# EAGLE board Motor_Driver_v2 (EAGLE 7.4.0)
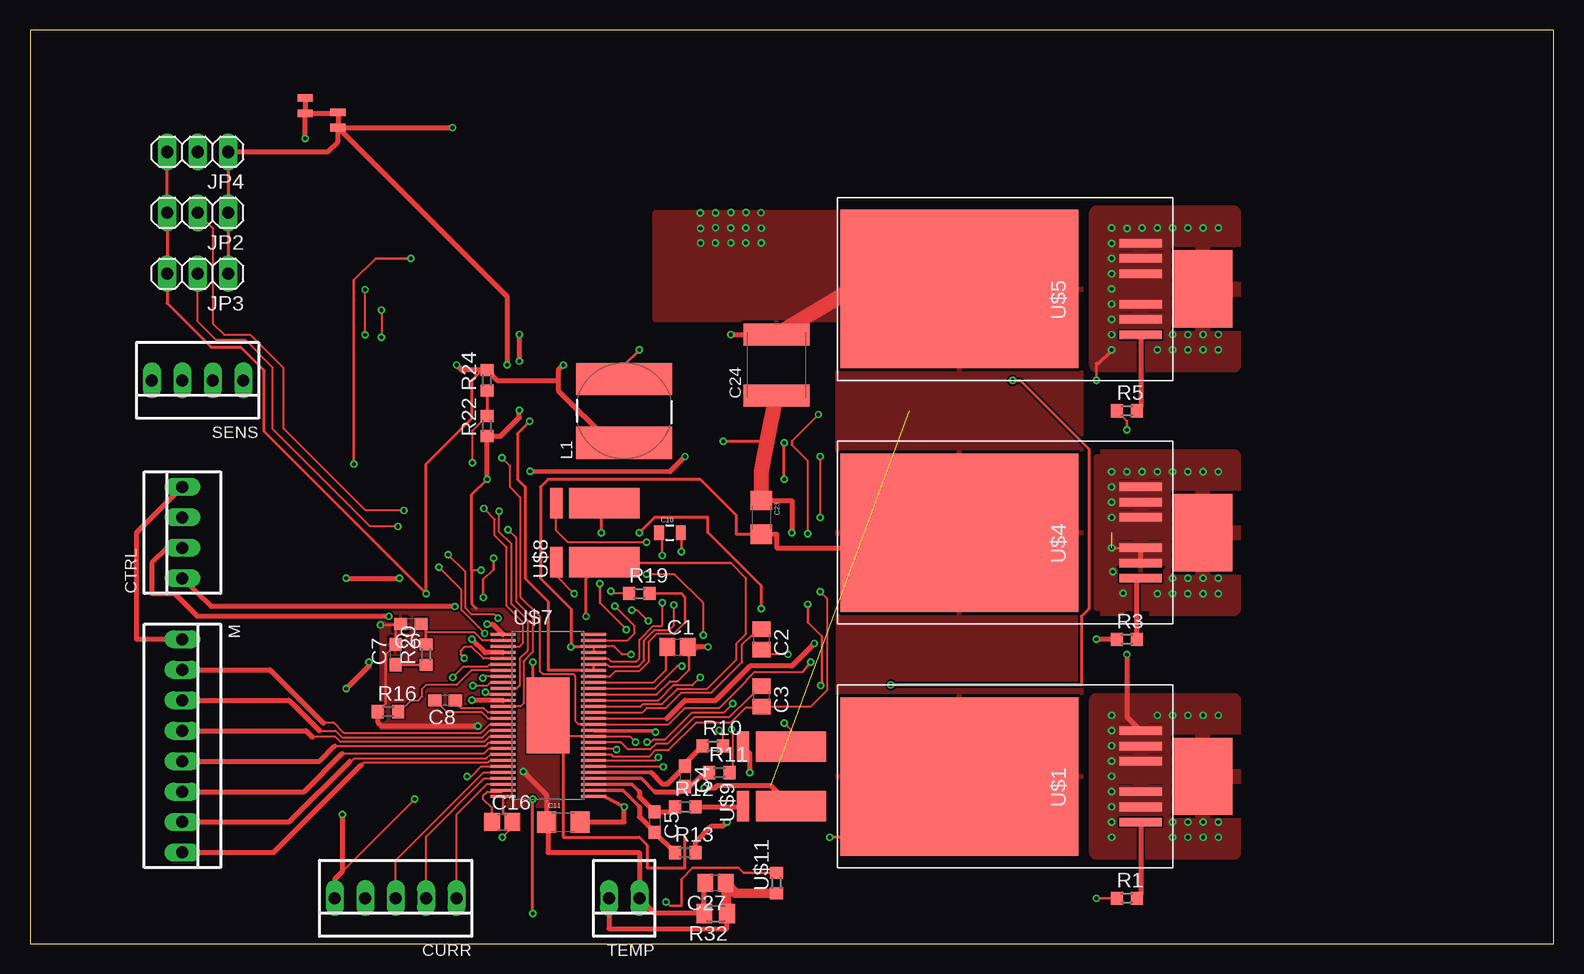
[diagram p0: board, top side]
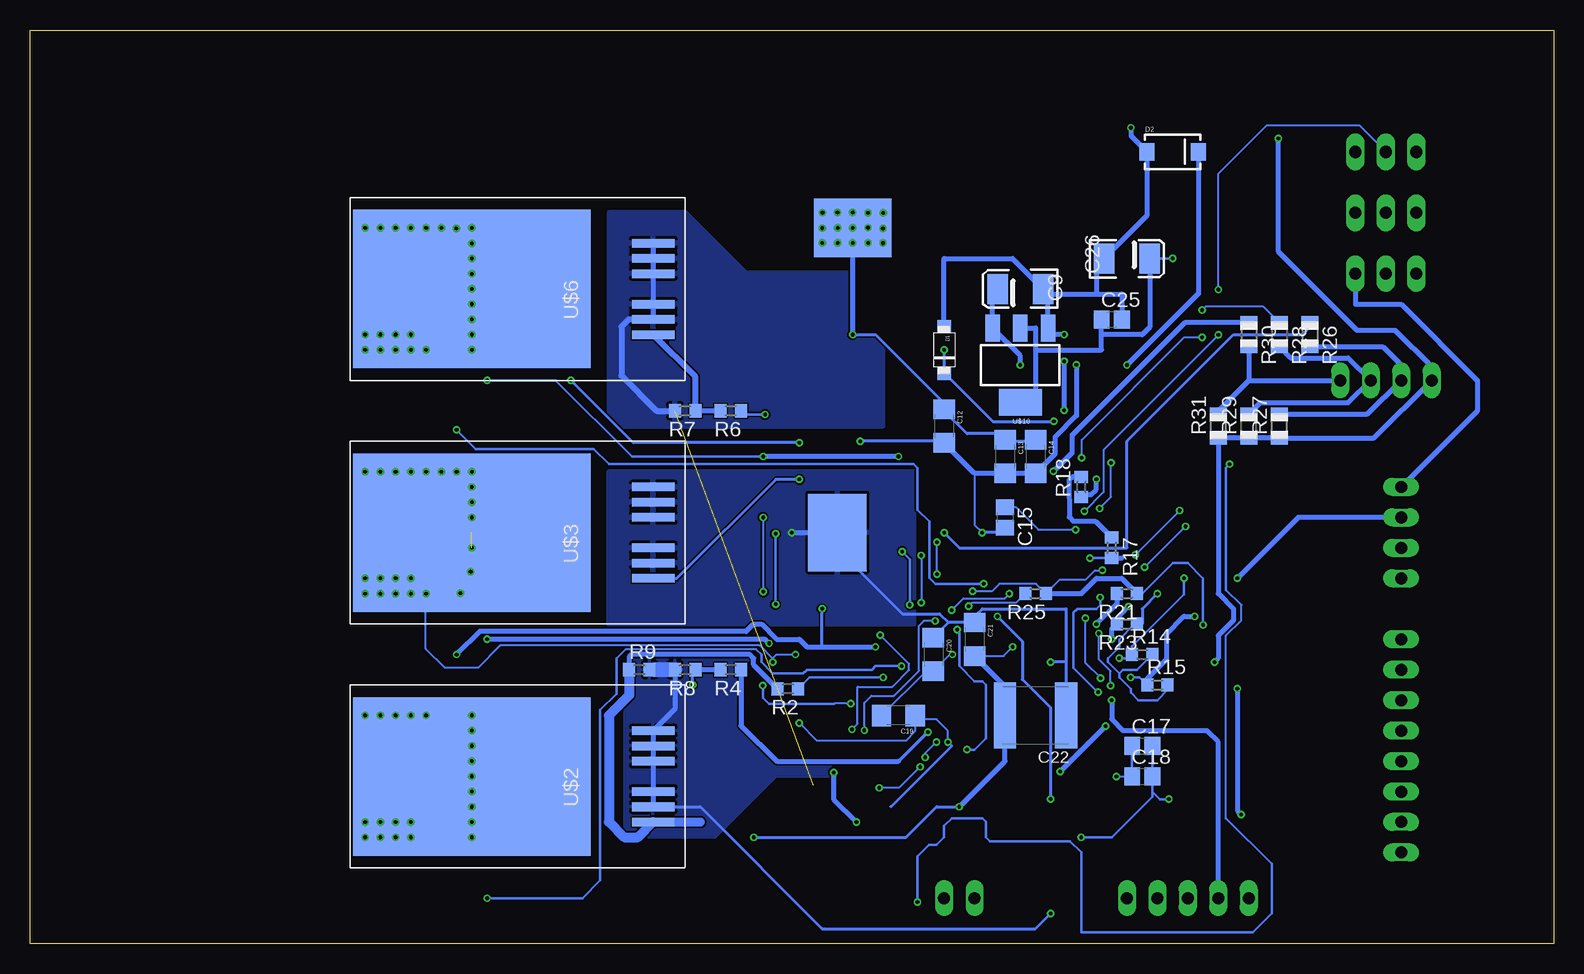
[diagram p1: board, bottom side, seen from below]

Size 127 x 76.2 mm. Coordinates in mm from the lower left corner, seen from the top.
Outline: 0,0 127,0 127,76.2 0,76.2 0,0
Copper layers (1*16): Top 0.035mm / dielectric 1.5mm / Bottom 0.035mm
Design rules "ITEADstudio_DRC": minimum track width 6mil, minimum drill 12mil, track to track 6mil, track to pad 6mil, pad to pad 6mil, via to via 6mil, smd to smd 0mil, copper to edge 10mil, drill to drill 10mil, minimum pad ring 10mil, minimum via ring 6mil, stop-mask expansion 2mil, vias tented up to drill 100mil, thermal gap 10mil

## Footprints (pad centres in the part's own frame; a part is rotated, then mirrored left to right if it is on the bottom)
C0805 = smd 1.3 x 1.5: 1 -0.85,0; 2 0.85,0
C0603 = smd 1.1 x 1: 1 -0.85,0; 2 0.85,0
EIA3528-KIT = smd 1.7 x 2.5: A 1.9,0; C -1.9,0
0805 = smd 0.8 x 1.2: 1 -0.9,0; 2 0.9,0
1206 = smd 1.6 x 1.8: 1 -1.4,0; 2 1.4,0
C2220K = smd 1.85 x 5.5: 1 -2.55,0; 2 2.55,0
22-23-2041 = drill 1 long: 1 -3.81,0; 2 -1.27,0; 3 1.27,0; 4 3.81,0
22-23-2051 = drill 1 long: 1 -5.08,0; 2 -2.54,0; 3 0,0; 4 2.54,0; 5 5.08,0
SOD123W = smd 1.1 x 1.1: P$1 -1.95,0; P$2 1.95,0
SMA-DIODE = smd 1.27 x 1.47: A -2.15,0; C 2.15,0
1X03 = drill 1.016 long: 1 -2.54,0; 2 0,0; 3 2.54,0
SDR0805 = smd 2.7 x 8: 1 -2.65,0; 2 2.65,0
22-23-2081 = drill 1 long: 1 -8.89,0; 2 -6.35,0; 3 -3.81,0; 4 -1.27,0; 5 1.27,0; 6 3.81,0; 7 6.35,0; 8 8.89,0
2PT_GND_TIE = smd 1.27 x 0.635: P$1 0,0.635; P$2 0,-0.635
R0603 = smd 1 x 1.1: 1 -0.85,0; 2 0.85,0
R0805 = smd 1.1 x 1.4: 1 -1,0; 2 1,0
M0805 = smd 1.3 x 1.6: 1 -0.95,0; 2 0.95,0
22-23-2021 = drill 1 long: 1 -1.27,0; 2 1.27,0
IRF7530_HEATSINK = smd 13.208 x 19.812: D1 0,1.27 | smd 0.711 x 3.556: G1 -3.81,-13.856; S1 -2.54,-13.856; S2 -1.27,-13.856; S3 1.27,-13.856; S4 2.54,-13.856; S5 3.81,-13.856
DRV8302 = smd 3.61 x 6.35: GND 0,0 | smd 2.1 x 0.27: P$1 -3.75,6.75; P$2 -3.75,6.25; P$3 -3.75,5.75; P$4 -3.75,5.25; P$5 -3.75,4.75; P$6 -3.75,4.25; P$7 -3.75,3.75; P$8 -3.75,3.25; P$9 -3.75,2.75; P$10 -3.75,2.25; P$11 -3.75,1.75; P$12 -3.75,1.25; P$13 -3.75,0.75; P$14 -3.75,0.25; P$15 -3.75,-0.25; P$16 -3.75,-0.75; P$17 -3.75,-1.25; P$18 -3.75,-1.75; P$19 -3.75,-2.25; P$20 -3.75,-2.75; P$21 -3.75,-3.25; P$22 -3.75,-3.75; P$23 -3.75,-4.25; P$24 -3.75,-4.75; P$25 -3.75,-5.25; P$26 -3.75,-5.75; P$27 -3.75,-6.25; P$28 -3.75,-6.75; P$29 3.8,-6.75; P$30 3.8,-6.25; P$31 3.8,-5.75; P$32 3.8,-5.25; P$33 3.8,-4.75; P$34 3.8,-4.25; P$35 3.8,-3.75; P$36 3.8,-3.25; P$37 3.8,-2.75; P$38 3.8,-2.25; P$39 3.8,-1.75; P$40 3.8,-1.25; P$41 3.8,-0.75; P$42 3.8,-0.25; P$43 3.8,0.25; P$44 3.8,0.75; P$45 3.8,1.25; P$46 3.8,1.75; P$47 3.8,2.25; P$48 3.8,2.75; P$49 3.8,3.25; P$50 3.8,3.75; P$51 3.8,4.25; P$52 3.8,4.75; P$53 3.8,5.25; P$54 3.8,5.75; P$55 3.8,6.25; P$56 3.8,6.75
WSLP2726 = smd 2.54 x 5.842: P$1 -2.464,-0.889; P$2 2.464,-0.889 | smd 2.54 x 1.016: P$3 -2.464,3.111; P$4 2.464,3.111
SOT223 = smd 1.219 x 2.235: 1 -2.311,-3.099; 2 0,-3.099; 3 2.311,-3.099 | smd 3.6 x 2.2: 4 0,3.099
1CONN_PAD = smd 6.452 x 4.877: P$1 0,0

## Placement (x,y rotation side)
C1  220n  [C0805]  53.98,24.77 0 top
C2  220n  [C0805]  60.96,25.4 270 top
C3  220n  [C0805]  60.96,20.64 270 top
C4  2.2n  [C0603]  54.61,13.97 270 top
C5  2.2n  [C0603]  52.07,10.16 270 top
C6  6.8nF  [C0603]  31.75,26.67 180 top
C7  120pF  [C0603]  30.48,24.13 90 top
C8  22nF  [C0603]  34.61,20.32 180 top
C9  100uF  [EIA3528-KIT]  44.45,54.61 180 bottom
C10  100nF  [0805]  53.34,34.29 0 top
C11  10u,50V  [1206]  44.45,10.16 0 top
C12  10u,50V  [1206]  50.8,43.18 270 bottom
C13  10u,50V  [1206]  45.72,40.64 270 bottom
C14  10u,50V  [1206]  43.18,40.64 270 bottom
C15  2.2u  [C0805]  45.72,35.56 270 bottom
C16  2.2u  [C0805]  39.37,10.16 0 top
C17  2.2u  [C0805]  34.29,16.51 0 bottom
C18  2.2u  [C0805]  34.29,13.97 0 bottom
C19  10u,50V  [1206]  54.61,19.05 180 bottom
C20  10u,50V  [1206]  51.7,24.14 270 bottom
C21  10u,50V  [1206]  48.26,25.4 270 bottom
C22  15u,100V  [C2220K]  43.18,19.05 180 bottom
C23  10u,50V  [1206]  60.96,35.56 270 top
C24  15u,100V  [C2220K]  62.23,48.26 90 top
C25  2.2u  [C0805]  36.83,52.07 0 bottom
C26  100uF  [EIA3528-KIT]  35.56,57.15 0 bottom
C27  2.2u  [C0805]  57.15,5.08 180 top
CTRL  22-23-2041  [22-23-2041]  12.7,34.29 90 top
CURR  22-23-2051  [22-23-2051]  30.48,3.81 180 top
D1  PMEG6020ER,115  [SOD123W]  50.8,49.53 270 bottom
D2  SMAJ5.0A  [SMA-DIODE]  31.75,66.04 0 bottom
JP2  M_PWM  [1X03]  13.97,60.96 180 top
JP3  M_OC  [1X03]  13.97,55.88 180 top
JP4  GAIN  [1X03]  13.97,66.04 180 top
L1  22uH  [SDR0805]  49.53,44.45 90 top
M  22-23-2081  [22-23-2081]  12.7,16.51 270 top
PT1  2PT_GND_TIE  [2PT_GND_TIE]  25.67,68.69 0 top
PT2  2PT_GND_TIE  [2PT_GND_TIE]  22.94,69.89 0 top
R1  4.7K  [R0603]  91.44,3.81 0 top
R2  4.7K  [R0603]  63.82,21.27 180 bottom
R3  4.7K  [R0603]  91.44,25.4 0 top
R4  4.7K  [R0603]  68.58,22.86 180 bottom
R5  4.7K  [R0603]  91.44,44.45 0 top
R6  4.7K  [R0603]  68.58,44.45 180 bottom
R7  39K  [R0603]  72.39,44.45 180 bottom
R8  39K  [R0603]  72.39,22.86 180 bottom
R9  39K  [R0603]  76.2,22.86 0 bottom
R10  100R  [R0603]  56.92,16.51 0 top
R11  100R  [R0603]  57.47,14.29 0 top
R12  100R  [R0603]  54.61,11.43 0 top
R13  100R  [R0603]  54.61,7.62 0 top
R14  10K  [R0603]  34.29,24.13 0 bottom
R15  10K  [R0603]  33.02,21.59 0 bottom
R16  10K  [R0603]  29.84,19.37 0 top
R17  270K  [R0603]  36.83,33.02 270 bottom
R18  10K  [R0603]  39.37,38.1 90 bottom
R19  1M  [R0603]  50.8,29.21 0 top
R20  15K  [R0603]  33.02,24.13 90 top
R21  220K  [R0603]  35.56,29.21 180 bottom
R22  3.3K  [R0603]  38.1,43.18 90 top
R23  10K  [R0603]  35.56,26.67 180 bottom
R24  18K  [R0603]  38.1,46.99 90 top
R25  0R  [R0603]  43.18,29.21 180 bottom
R26  39K  [R0805]  20.32,50.8 270 bottom
R27  2.2K  [R0805]  22.86,43.18 90 bottom
R28  39K  [R0805]  22.86,50.8 270 bottom
R29  2.2K  [R0805]  25.4,43.18 90 bottom
R30  39K  [R0805]  25.4,50.8 270 bottom
R31  2.2K  [R0805]  27.94,43.18 90 bottom
R32  10K  [M0805]  57.15,2.54 180 top
SENS  22-23-2041  [22-23-2041]  13.97,46.99 180 top
TEMP  22-23-2021  [22-23-2021]  49.53,3.81 180 top
U$1  IRFS7530  [IRF7530_HEATSINK]  78.74,13.97 90 top
U$2  IRFS7530  [IRF7530_HEATSINK]  88.9,13.97 90 bottom
U$3  IRFS7530  [IRF7530_HEATSINK]  88.9,34.29 90 bottom
U$4  IRFS7530  [IRF7530_HEATSINK]  78.74,34.29 90 top
U$5  IRFS7530  [IRF7530_HEATSINK]  78.74,54.61 90 top
U$6  IRFS7530  [IRF7530_HEATSINK]  88.9,54.61 90 bottom
U$7  DRV8302  [DRV8302]  43.18,19.05 0 top
U$8  WSLP2726  [WSLP2726]  46.99,34.29 90 top
U$9  WSLP2726  [WSLP2726]  62.55,13.97 90 top
U$10  TC2117  [SOT223]  44.45,48.26 180 bottom
U$11  NCP18XH103F03RB  [R0603]  62.23,5.08 90 top
U$12  1CONN_SOLDER  [1CONN_PAD]  97.79,54.61 90 top
U$13  1CONN_SOLDER  [1CONN_PAD]  97.79,34.29 90 top
U$14  1CONN_SOLDER  [1CONN_PAD]  97.79,13.97 90 top
U$15  1CONN_SOLDER  [1CONN_PAD]  58.42,59.69 0 bottom
U$16  1CONN_SOLDER  [1CONN_PAD]  59.69,34.29 270 bottom

## Library data of the parts
C1-C8 C15-C18 C25 C27 R1-R32 = adafruit
C9 C26 = SparkFun-Capacitors
C10-C14 C19-C21 C23 PT1 PT2 = SparkFun-Passives
C22 C24 = resistor
CTRL SENS = con-molex; MF: MOLEX; MPN: 22-23-2041; OC_FARNELL: 1462920; OC_NEWARK: 38C0355
CURR = con-molex; MF: MOLEX; MPN: 22-23-2051; OC_FARNELL: 1462952; OC_NEWARK: 38C9178
D1 = nxp
D2 = SparkFun-DiscreteSemi
JP2-JP4 = pinhead
L1 = bourne
M = con-molex; MF: MOLEX; MPN: 22-23-2081; OC_FARNELL: 1756826; OC_NEWARK: 01C7592
TEMP = con-molex; MF: MOLEX; MPN: 22-23-2021; OC_FARNELL: 1462926; OC_NEWARK: 25C3832
U$1-U$16 = bldc_lib

## Nets
+3V3: C25.1 C26.A U$10.2 U$10.4 U$11.2
+5V: C9.A D2.C JP2.3 JP3.3 JP4.3 L1.1 R14.2 R15.2 R23.1 R24.2 U$10.3
AGND: C16.2 C17.2 C18.2 CURR.5 PT2.P$2 R27.1 R29.1 R31.1 SENS.4 U$7.P$28
DC_CAL: CURR.4 U$7.P$12
DGND: C6.2 C7.2 C9.C C11.1 C25.2 C26.C C27.2 CTRL.4 D1.P$1 D2.A JP2.1 JP3.1 JP4.1 M.1 PT1.P$2 R16.1 R18.1 R19.1 R21.1 R22.1 R25.1 R32.2 TEMP.1 U$10.1
DVDD: R17.1 R18.2
EN_GATE: M.2 U$7.P$16
FAULT: CTRL.2 R15.1 U$7.P$6
GAIN: JP4.2 U$7.P$10
GH_A: R1.1 U$7.P$47
GH_B: R3.1 U$7.P$42
GH_C: R5.1 U$7.P$37
GL_A: R2.1 U$7.P$45
GL_B: R4.1 U$7.P$40
GL_C: R6.1 U$7.P$35
GND: C12.2 C13.2 C14.2 C15.2 C19.1 C20.1 C21.1 C22.1 C23.1 C24.1 PT1.P$1 PT2.P$1 U$3.S1 U$3.S2 U$3.S3 U$3.S4 U$3.S5 U$7.GND U$7.P$39 U$8.P$2 U$9.P$2 U$16.P$1
H1: M.3 U$7.P$17
H1_LOW: R8.2 R9.2 U$2.S1 U$2.S2 U$2.S3 U$2.S4 U$2.S5 U$7.P$44 U$8.P$1
H1_VS: C1.2 R26.1 U$1.S1 U$1.S2 U$1.S3 U$1.S4 U$1.S5 U$2.D1 U$7.P$46 U$14.P$1
H2: M.5 U$7.P$19
H2_VS: C2.2 R28.1 U$3.D1 U$4.S1 U$4.S2 U$4.S3 U$4.S4 U$4.S5 U$7.P$41 U$13.P$1
H3: M.7 U$7.P$21
H3_LOW: R7.2 U$6.S1 U$6.S2 U$6.S3 U$6.S4 U$6.S5 U$7.P$34 U$9.P$1
H3_VS: C3.2 R30.1 U$5.S1 U$5.S2 U$5.S3 U$5.S4 U$5.S5 U$6.D1 U$7.P$36 U$12.P$1
L1: M.4 U$7.P$18
L2: M.6 U$7.P$20
L3: M.8 U$7.P$22
M_OC: JP3.2 U$7.P$9
M_PWM: JP2.2 U$7.P$8
N$1: R1.2 U$1.G1
N$2: R2.2 R9.1 U$2.G1
N$3: R4.2 R8.1 U$3.G1
N$4: R3.2 U$4.G1
N$5: R5.2 U$5.G1
N$6: R6.2 R7.1 U$6.G1
N$7: C1.1 U$7.P$48
N$8: R17.2 U$7.P$11
N$10: C8.1 U$7.P$14
N$11: C5.2 R13.1 U$7.P$30
N$12: C2.1 U$7.P$43
N$13: C8.2 U$7.P$15
N$14: C7.1 R20.1
N$15: R21.2 U$7.P$1
N$16: R16.2 U$7.P$7
N$17: R25.2 U$7.P$55
N$18: C15.1 U$7.P$13
N$19: C10.2 D1.P$2 L1.2 U$7.P$50 U$7.P$51
N$20: C6.1 R20.2 U$7.P$2
N$21: R19.2 U$7.P$49
N$22: C4.1 R10.1 U$7.P$33
N$23: C4.2 R11.1 U$7.P$32
N$24: C5.1 R12.1 U$7.P$31
N$26: C3.1 U$7.P$38
N$27: C16.1 U$7.P$27
N$28: R22.2 R24.1 U$7.P$3
N$29: C10.1 U$7.P$52
N$30: C17.1 C18.1 U$7.P$23
N$124: R12.2 U$9.P$3
N$126: R10.2 U$8.P$3
N$127: R11.2 U$8.P$4
N$128: R13.2 U$9.P$4
OCTW: CTRL.3 R14.1 U$7.P$5
PWRGD: CTRL.1 R23.2 U$7.P$4
REF: CURR.3 U$7.P$24
SENS1: R26.2 R27.2 SENS.3
SENS2: R28.2 R29.2 SENS.2
SENS3: R30.2 R31.2 SENS.1
SO1: CURR.2 U$7.P$25
SO2: CURR.1 U$7.P$26
TEMP: C27.1 R32.1 TEMP.2 U$11.1
VCC: C11.2 C12.1 C13.1 C14.1 C19.2 C20.2 C21.2 C22.2 C23.2 C24.2 U$1.D1 U$4.D1 U$5.D1 U$7.P$29 U$7.P$53 U$7.P$54 U$15.P$1

## Tracks (layer width: path | path; a pad name or v marks a point on that pad's centre or on a via)
+3V3  (via drill 0.3)
  Top 0.203: U$11.2 59.48,5.93 59.05,6.35 55.24,6.35 54.29,5.4 54.29,3.17 53.34,3.17 v53.02,3.49 | v26.99,40.01 26.99,55.33 28.81,57.15 v31.75,57.15
  Bottom 0.16: 27.3,10.48 27.3,25.72 26.04,26.99 26.04,28.26
  Bottom 0.203: v53.02,3.49 53.02,7.3 52.07,8.26 51.44,8.26 50.8,8.89 50.8,9.84 50.16,10.48 47.62,10.48 47.31,10.16 47.31,8.89 46.99,8.57 40.32,8.57 39.37,7.62 39.37,0.95 25.08,0.95 23.5,2.54 23.5,6.67 27.3,10.48 | 26.04,28.26 27.3,29.53 27.3,39.69 v26.99,40.01 | v31.75,57.15 C26.A
  Bottom 0.406: U$10.2 43.18,51.36 43.18,49.53 | 43.18,49.53 37.68,49.53 C25.1 37.68,50.8 34.29,50.8 33.66,51.43 C26.A | 43.74,44.45 44.09,44.81 | 44.09,44.81 U$10.4 | 43.18,49.53 43.18,45.72 44.09,44.81
+5V  (via drill 0.3)
  Top 0.254: JP4.3 JP2.3 JP3.3 11.43,53.41 15.09,49.76 17.55,49.76 19.53,47.78 19.53,42.7 v33.02,29.21 33.02,40.01 36.83,43.81 36.83,46.99 38.1,48.26 R24.2
  Top 0.406: v35.56,48.26 35.98,47.84 R24.2 38.95,46.99 44.03,46.99 | v44.45,48.26 44.03,47.84 44.03,46.99 | 44.03,46.99 44.03,46.14 48.26,41.91 49.42,41.91 L1.1
  Bottom 0.203: R15.2 32.17,21.17 33.02,20.32 34.61,20.32 35.24,20.95 35.24,21.27 36.2,22.23 36.2,22.54 | 36.2,22.54 35.88,22.86 34.71,22.86 R14.2 | R23.1 34.92,26.67 36.2,25.4 36.2,24.77 37.15,23.81 37.15,23.5 36.2,22.54
  Bottom 0.254: v33.02,29.21 34.29,27.94 34.29,26.67 R23.1
  Bottom 0.406: C9.A 46.76,54.2 U$10.3 44.45,49.05 v44.45,48.26 | D2.C 29.6,54.22 v35.56,48.26
AGND  (via drill 0.3)
  Top 0.203: U$7.P$28 39.43,10.95 C16.2 40.22,9.74 v39.37,8.89 | CURR.5 25.4,5.4 v32.07,12.06
  Top 0.406: v28.26,23.5 28.26,23.18 v26.35,21.27 | v26.04,10.79 26.04,6.03 25.4,5.4 | v22.94,67.15 PT2.P$2
  Bottom 0.203: v39.37,8.89 36.83,8.89 33.44,12.28 33.44,12.7 | C17.2 C18.2 33.44,12.7 | v32.07,12.06 32.8,12.06 33.44,12.7
  Bottom 0.406: v28.26,23.5 27.94,23.81 27.94,25.72 26.67,26.99 26.67,27.94 27.94,29.21 R31.1 R29.1 R27.1 14.97,42.18 SENS.4 10.16,48.12 13.19,51.15 16.36,51.15 22.94,57.73 v22.94,67.15 | v26.35,21.27 26.35,11.11 v26.04,10.79
DC_CAL  (via drill 0.3)
  Top 0.406: U$7.P$12 36.85,20.3 v36.83,20.32
  Bottom 0.406: CURR.4 27.94,16.83 28.89,17.78 35.88,17.78 36.83,18.73 v36.83,20.32
DGND  (via drill 0.3, 0.31)
  Top 0.16: v37.6,31.15 36.91,31.15 36.83,31.07 | R19.1 48.62,29.21 v48.43,29.4
  Top 0.203: 30.48,26.25 C7.2 29.66,24.15 29.66,20.03 R16.1 | v29.21,26.6 30.83,26.6 C6.2
  Top 0.254: JP4.1 JP2.1 JP3.1 | v38.1,38.73 36.83,37.47 36.83,31.07 36.83,28.37 37.21,27.99
  Top 0.406: M.1 8.89,25.4 8.89,34.29 CTRL.4 | v38.1,38.73 R22.1 39.23,42.33 40.79,43.88 40.79,44.49 v40.8,44.5 | C27.2 56.2,4.98 R32.2 52.07,2.54 TEMP.1 50.8,7.62 43.18,7.62 43.18,10.16 C11.1 43.05,12.44 v41.12,14.37 | R16.1 29,18.48 29.3,18.17 v37.32,18.17 | JP4.1 24.81,66.04 25.67,66.89 PT1.P$2 v35.23,68.06 v35.23,68.05 | v40.79,48.59 v40.8,48.59 v40.8,50.8
  Bottom 0.16: v37.6,31.15 38.23,31.15 38.99,30.39 41.15,30.39 R25.1 43.14,30.02 46.2,30.02 46.81,29.4 v48.43,29.4
  Bottom 0.203: R21.1 34.29,29.21 31.75,31.75 30.48,31.75 29.21,30.48 v29.21,26.6
  Bottom 0.406: 42.14,54.2 U$10.1 41.58,50.8 v40.8,50.8 | 42.14,54.2 C9.C 45.09,57.15 50.8,57.15 D1.P$1 | 42.14,54.2 38.1,54.2 | 38.1,54.2 35.98,54.2 C25.2 | 38.1,54.2 38.1,57.15 C26.C 33.9,60.71 D2.A 35.23,67.37 v35.23,68.05 | JP3.1 16.51,53.34 12.7,53.34 6.35,46.99 6.35,44.45 CTRL.4 | R18.1 39.37,37.47 38.55,37.47 38.12,37.89 38.12,38.72 v38.1,38.73 | R25.1 39.37,29.21 38.1,30.48 35.98,30.48 R21.1 | v37.32,18.17 v41.12,14.38 v41.12,14.37 | v40.79,48.59 v40.79,44.5 v40.8,44.5
  pour Top: 29.21,27.94 48.26,27.94 48.26,11.43 29.21,11.43
DVDD
  Bottom 0.406: R18.2 40.02,38.97 40.38,38.65 40.37,35.58 40.05,35.26 38.2,35.24 R17.1
EN_GATE
  Top 0.16: U$7.P$16 38.3,18.3 37.6,17.6 26.16,17.6 25.34,18.41 24.45,18.41
  Top 0.406: M.2 20,22.86 24.45,18.41
FAULT  (via drill 0.3)
  Top 0.16: v35.24,22.23 36.15,23.13 38.14,23.13 38.31,23.3 U$7.P$6
  Top 0.406: CTRL.2 11.43,33.02 10.16,31.75 10.16,29.21 12.06,29.21 13.97,27.3 v29.91,27.3
  Bottom 0.203: v35.24,22.23 34.51,22.23 R15.1
  Bottom 0.406: 33.66,21.59 R15.1 33.85,21.61 33.85,22.13 33.86,22.12 33.87,22.12 32.27,23.72 32.27,25.8 30.8,27.3 v29.91,27.3
GAIN  (via drill 0.3)
  Top 0.16: U$7.P$10 40.58,21.3 40.82,21.55 40.82,23.8 41.47,24.44 41.47,27 40.13,28.33 40.13,33.33 39.1,34.36 v39.1,36.07 | v27.94,50.77 v27.94,54.55 v27.93,54.55
  Bottom 0.16: v39.1,36.08 v39.1,36.07 v39.1,36.08 37.51,37.67 37.51,41.2 v27.94,50.77 | v27.93,54.55 27.93,64.24 23.92,68.25 16.18,68.25 JP4.2
GH_A  (via drill 0.3)
  Top 0.16: U$7.P$47 52.1,21.3
  Top 0.203: v88.9,3.81 R1.1 | 52.1,21.3 53.97,23.17 v54.34,23.17 v54.35,23.17
  Bottom 0.152: 66.04,24.13 66.48,24.57 77.35,24.57 78.11,23.81 | 78.11,23.81
  Bottom 0.203: 66.04,24.13 66.04,23.5 65.09,22.54 62.55,22.54 62.23,22.86 56.83,22.86 56.52,23.18 v54.35,23.18 v54.35,23.17 | v88.9,3.81 80.95,3.81 79.48,5.29 79.48,19.5 78.11,20.86 78.11,23.81 | 78.11,23.81
GH_B  (via drill 0.3)
  Top 0.152: 51.19,18.8 53.09,18.8
  Top 0.16: U$7.P$42 51.19,18.8
  Top 0.406: R3.1 v88.9,25.4 | 53.09,18.8 54.61,20.32 57.15,20.32 60.01,23.18 63.51,23.18 v65.39,25.06
  Bottom 0.406: v65.39,25.06 65.73,25.4 v88.9,25.4
GH_C  (via drill 0.3)
  Top 0.152: U$7.P$37 48.79,16.3 v48.9,16.19
  Top 0.203: 90.81,44.23 R5.1 91.44,43.6 v91.44,42.86 | v47.51,30.02 47.51,28.41 v49.71,26.2
  Bottom 0.203: v48.9,16.19 48.26,16.19 47.31,17.14 47.31,21.59 47.62,21.91 48.26,21.91 49.53,23.18 49.53,26.02 v49.71,26.2 | v91.44,42.86 89.85,41.27 80.01,41.27 78.74,40.01 53.34,40.01 53.02,39.69 53.02,36.2 52.04,35.21 52.04,30.53 51.53,30.02 50.93,30.02 50.92,30.02 v47.51,30.02
GL_A  (via drill 0.3)
  Top 0.16: 47,20.32 52.39,20.32 53.66,21.59 55.24,21.59 v55.88,22.23
  Top 0.203: U$7.P$45 47,20.32
  Bottom 0.203: v55.88,22.23 62.02,22.23 R2.1
GL_B  (via drill 0.31)
  Top 0.16: 46.98,17.78 U$7.P$40 47,17.78
  Top 0.305: 47,17.78 52.03,17.78 v52.14,17.67
  Bottom 0.305: v52.14,17.67 52.16,17.67 54.59,15.24
  Bottom 0.406: R4.1 67.73,18.2 64.75,15.24 54.59,15.24
GL_C  (via drill 0.3, 0.31)
  Top 0.16: U$7.P$35 52.13,15.3 v52.39,15.56 | v51.44,16.83 51.75,16.83 51.98,17.07 52.93,17.07 54.29,18.41 54.3,18.41 55.18,19.29 57.84,19.29 v58.59,20.04 | v64.84,34.19 64.84,40.25 63.5,41.59
  Top 0.203: 63.5,41.59 63.5,41.91 v65.72,44.13 | v65.91,21.55 66,21.64 66,25.63 64.84,26.8 v64.84,28.31
  Bottom 0.16: v52.39,15.56 52.39,15.88 v51.44,16.83 | v58.59,20.04 59.94,20.04 59.98,20
  Bottom 0.203: 59.98,20 65.41,20 65.91,20.5 v65.91,21.55 | v65.72,44.13 67.41,44.13 R6.1 | v64.84,34.19 v64.84,28.31
GND  (via drill 0.3)
  Top 0.152: U$7.P$39 50.01,17.3 v50.48,16.83
  Top 0.16: U$7.P$39 44.55,17.3 44.45,17.2
  Top 0.203: U$9.P$2 63.44,17.84 v62.87,18.41
  Top 0.254: v41.91,23.5 41.91,20.32 U$7.GND 44.45,17.78 44.45,17.2 44.45,8.89 50.8,8.89 51.44,8.26 51.44,6.35 54.61,6.35 54.61,8.89 | v47.62,34.29 47.62,36.2 U$8.P$2 | v57.78,41.91 60.96,41.91 61.45,41.81
  Top 0.406: C23.1 63.5,36.96 v63.5,34.29 | 25.67,68.06 39.77,53.95 v39.77,48.28 | 22.94,69.25 25.6,69.25 PT1.P$1
  Top 1.27: C23.1 60.96,39.36 61.45,41.81 C24.1
  Bottom 0.152: v50.48,16.83 50.48,17.78 51.44,18.73 52.89,18.73
  Bottom 0.16: 52.89,18.73 C19.1 53.21,17.72 54,16.93 61.38,16.93 v62.87,18.41 | 52.07,26.04 C20.1 | 48.26,39.24 48.26,34.92 v47.62,34.29
  Bottom 0.254: 40.64,23.5 40.64,27.94 47.62,27.94 48.26,27.3 C21.1 50.44,26.8 | 40.64,23.5 C22.1 | 40.64,23.5 v41.91,23.5 | 55.24,11.43 50.16,16.51 v50.48,16.83 | v47.62,34.29 45.72,34.29 C15.2 | v57.78,41.91 50.8,41.91 C12.2 | 50.44,26.8 C20.1 | U$16.P$1 59.69,32.94 54.28,27.53 51.17,27.53 50.44,26.8
  Bottom 0.406: C12.2 48.26,39.24 C13.2 C14.2 41.53,40.89 41.53,42.28 39.76,44.05 v39.76,48.27 v39.77,48.28 | v63.5,34.29 U$16.P$1
  pour Bottom: 78.74,39.37 53.34,39.37 53.34,26.67 78.74,26.67
H1
  Top 0.16: 39.37,17.78 39.41,17.78 | 24.13,17.78 25.46,17.78 26.03,17.21 37.71,17.21 38.3,17.8 U$7.P$17 | U$7.P$17
  Top 0.254: 39.37,17.78 U$7.P$17
  Top 0.406: M.3 21.59,20.32 24.13,17.78
H1_LOW  (via drill 0.3)
  Top 0.16: U$7.P$44 50.91,19.8 51.12,20 52.7,20 53.98,21.27 56.42,21.27 58.9,23.71 58.88,25.04 59.69,25.85 59.69,30.48
  Top 0.203: 59.69,30.48 58.42,31.75 48.26,31.75 47.95,31.75
  Top 0.254: 48.26,31.75 U$8.P$1 47.62,31.75 46.35,30.48 v46.35,27.3 | v41.91,2.54 v41.91,12.06
  Bottom 0.254: v41.91,12.06 41.91,19.68 44.28,22.05 44.28,25.23 v46.35,27.3 | v41.91,2.54 43.18,1.27 60.96,1.27 71.12,11.43 U$2.S1
  Bottom 0.406: R8.2 73.24,19.58 U$2.S5 U$2.S4 U$2.S3 U$2.S2 U$2.S1
  Bottom 1.27: R8.2 74.93,22.86
  pour Bottom: 53.34,24.13 77.47,24.13 77.47,8.89 69.85,8.89 64.77,13.97 53.34,13.97
H1_VS  (via drill 0.3)
  Top 0.16: U$7.P$46 52.23,20.8 53.34,21.91 53.98,21.91 54.93,22.86
  Top 0.203: 54.93,22.86 54.93,24.13 54.93,24.66 C1.2
  Top 0.254: v50.8,34.29 52.07,35.56 56.52,35.56 56.52,34.29 60.96,29.84 v60.96,27.94
  Top 0.406: v56.52,24.77 55.56,24.77 54.93,24.13 | v91.44,24.13 91.44,18.94 U$1.S5
  Bottom 0.254: v50.8,34.29 49.53,33.02 35.56,33.02 35.56,41.91 26.67,50.8 20.95,50.8 20.32,51.44 R26.1 | 60.96,24.77 v60.96,27.94
  Bottom 0.406: v56.52,24.77 60.96,24.77 62.23,24.77 62.87,25.4 64.77,25.4 66.04,26.67 66.67,26.67 67.31,26.04 89.5,26.07 v91.44,24.13
  other vias: 90.17,19.05 90.17,17.78 90.17,16.51 90.17,15.24 90.17,13.97 90.17,12.7 90.17,11.43 90.17,10.16 90.17,8.89 95.25,8.89 96.52,8.89 97.79,8.89 99.06,8.89 99.06,10.16 97.79,10.16 96.52,10.16 95.25,10.16 99.06,19.05 97.79,19.05 96.52,19.05 95.25,19.05 93.98,19.05
  pour Top: 88.9,20.32 100.33,20.32 100.33,7.62 88.9,7.62
  pour Top: 88.9,20.32 100.33,20.32 100.33,7.62 88.9,7.62
H2
  Top 0.16: 25.4,16.51 38,16.51 38.29,16.8 U$7.P$19
  Top 0.203: 39.4,16.83 U$7.P$19
  Top 0.406: M.5 24.13,15.24 25.4,16.51
H2_VS  (via drill 0.3)  (1 unrouted)
  Top 0.152: 60.86,24.45 C2.2 61.38,24.13 v63.18,24.13 | 54.61,19.68 57.47,19.68 59.69,21.91 59.77,22.05 60.41,22.68 64.45,22.69 v65.09,23.5 | v90.17,33.02 U$4.S2
  Top 0.16: 54.61,19.68 53.23,18.3 U$7.P$41 45.74,18.3 45.47,18.57 45.47,22.32 45.31,22.48 42.76,22.48 42.51,22.73 42.51,27.29 | v39.33,40.54 40.02,39.85 40.02,38.08 40.87,37.23 40.87,28.92 42.51,27.29 | 42.51,27.29 | v29.29,52.85 v29.29,50.58
  Top 0.406: U$4.S1 U$4.S2
  Bottom 0.152: v65.09,23.5 65.09,23.81 | 65.09,23.81 64.77,24.13 v63.18,24.13 | v93.98,29.21 94,29.19 94,24.62 92.4,23.02 89.65,23.02 87.8,24.87 66.15,24.87 65.09,23.81
  Bottom 0.16: R28.1 24.2,53.15 28.99,53.15 v29.29,52.85 | v39.33,40.54 39.33,42.03 30.78,50.58 v29.29,50.58
  other vias: 90.17,35.56 90.17,36.83 90.17,38.1 90.17,39.37 91.44,39.37 92.71,39.37 93.98,39.37 95.25,39.37 96.52,39.37 97.79,39.37 99.06,39.37 95.25,30.48 96.52,30.48 97.79,30.48 99.06,30.48 95.25,29.21 96.52,29.21 97.79,29.21 99.06,29.21 91.12,29.24 90.27,31.02
  pour Top (isolate 0.813): 88.9,40.64 100.33,40.64 100.33,27.94 88.9,27.94
  pour Top: 88.9,40.64 100.33,40.64 100.33,27.94 88.9,27.94
H3
  Top 0.16: 26.67,15.24 26.79,15.24 27.01,15.46 38.04,15.46 38.38,15.8 U$7.P$21
  Top 0.406: M.7 21.59,10.16 26.67,15.24
H3_LOW  (via drill 0.3, 0.31)  (1 unrouted)
  Top 0.16: v52.79,14.77 47.01,14.77 U$7.P$34
  Top 0.406: v56.2,13.02 57.11,13.02 57.3,13.21 61.73,13.21 U$9.P$1
  Bottom 0.16: v52.79,14.77 | v52.79,14.77 54.54,13.02 v56.2,13.02
  Bottom 0.406: U$6.S5 U$6.S4 U$6.S3 U$6.S2 U$6.S1
  Bottom 0.508: U$6.S1 77.1,52.07 77.7,51.47 77.7,47.37 74.77,44.43 73.26,44.43 R7.2
  pour Bottom: 78.74,43.18 55.88,43.18 55.88,55.88 67.31,55.88 72.39,60.96 78.74,60.96
H3_VS  (via drill 0.3)
  Top 0.152: U$7.P$36 48.02,15.8
  Top 0.16: 48.02,15.8 48.46,15.8 48.65,15.61 51.59,15.61 52.14,16.16 53.23,16.16 55.56,18.49 58.44,18.49 59.69,19.74 60.91,19.74 C3.2 | 60.98,19.77 C3.2 | v65.86,40.64 65.86,35.56 v65.88,35.55 | C3.2 65.09,19.79 66.48,21.17 66.48,28.75 v65.86,29.36
  Top 0.203: v88.9,46.99 88.9,48.37
  Top 0.305: 88.9,48.37 89.07,48.37 90.22,49.52
  Top 0.406: v41.69,39.41 53.34,39.37 v54.61,40.64
  Bottom 0.16: v65.88,35.55 65.88,29.37 v65.86,29.36
  Bottom 0.203: v88.9,46.99 83.19,46.99 76.83,40.64 v65.86,40.64
  Bottom 0.406: R30.1 30.75,51.8 40.11,42.44 40.11,40.96 41.66,39.41 v41.69,39.41 | v54.61,40.64 v65.86,40.64
  other vias: 90.17,54.61 90.17,53.34 90.17,52.07 90.17,50.8 90.17,49.53 90.17,55.88 91.45,59.66 90.17,57.15 90.17,58.42 90.17,59.69 92.71,59.69 93.98,59.69 95.25,59.69 96.52,59.69 97.79,59.69 93.98,49.53 95.25,49.53 95.25,50.8 96.52,50.8 96.52,49.53 97.79,50.8 97.79,49.53 99.06,50.8 99.06,49.53 99.06,59.69
  pour Top (rank 2): 88.9,60.96 100.33,60.96 100.33,48.26 88.9,48.26
  pour Top: 88.9,60.96 100.33,60.96 100.33,48.26 88.9,48.26
L1
  Top 0.16: 23.54,17.25 23.59,17.3 25.44,17.3 25.85,16.89 37.89,16.89 38.3,17.3 U$7.P$18
  Top 0.406: M.4 23,17.78 23.54,17.25
L2
  Top 0.16: 39.4,16.33 U$7.P$20 38.28,16.3 37.85,15.88 26.04,15.88
  Top 0.406: M.6 22.86,12.7 26.04,15.88
L3
  Top 0.16: 27.62,14.92 27.83,15.13 38.17,15.13 38.34,15.3 U$7.P$22
  Top 0.406: M.8 20.32,7.62 27.62,14.92
M_OC  (via drill 0.3)
  Top 0.16: U$7.P$9 38.4,21.8 38.12,21.52 v36.93,21.52 v36.92,21.52 | v37.9,25.89 37.34,26.45 37.34,26.46 35.96,27.83 35.96,29.52 v34.09,31.4 | v30.68,34.81 28.35,34.81 20.25,42.91 20.25,48.08 17.96,50.35 15.51,50.35 13.97,51.89 JP3.2
  Bottom 0.16: v36.92,21.52 36.92,22.75 37.9,23.73 v37.9,25.89 | v34.09,31.4 v30.68,34.81
M_PWM  (via drill 0.3)
  Top 0.16: U$7.P$8 37.88,22.3 v37.74,22.16 | v39.02,27.17 38.72,27.47 36.83,27.47 36.3,28 36.3,31 v34.85,32.45 | v31.16,36.14 27.96,36.14 21.14,42.96 21.14,48.02 18.37,50.79 16.17,50.79 15.24,51.72 15.24,59.69 JP2.2
  Bottom 0.16: v37.74,22.16 39.02,23.44 v39.02,27.17 | v34.85,32.45 v31.16,36.14
N$1
  Top 0.406: U$1.G1 92.6,4.12 R1.2
N$2
  Bottom 0.406: R2.2 66.67,23.28 66.67,23.81 66.99,24.13 76.83,24.13 77.05,23.91 R9.1
  Bottom 0.762: U$2.G1 71.12,10.16
  Bottom 0.813: R9.1 77.05,20.74 78.74,19.05 78.74,10.16 77.47,8.89 76.31,8.89 U$2.G1
N$3  (via drill 0.3)
  Top 0.254: v71.75,21.59 87.63,21.59 87.63,27.3 88.27,27.94 88.27,41.27 82.55,46.99 v81.92,46.99 | v62.87,38.73 v62.87,41.78 v62.87,41.79
  Bottom 0.254: 71.12,22.86 R8.1 71.75,22.86 v71.75,21.59 | v81.92,46.99 76.71,41.79 v62.87,41.79 | v62.87,38.73 64.83,38.73 73.08,30.48 U$3.G1
  Bottom 0.406: R4.2 71.12,22.86
N$4
  Top 0.406: R3.2 92.29,30.17 U$4.G1
N$5
  Top 0.406: U$5.G1 92.6,44.76 R5.2
N$6
  Bottom 0.254: 71.12,44.45 R7.1
  Bottom 0.406: R6.2 71.12,44.45
  Bottom 0.508: R7.1 71.54,47.3 U$6.G1
N$7
  Top 0.16: U$7.P$48 51.96,21.8 53.02,22.86
  Top 0.203: 53.02,22.86 53.02,24.66 C1.1
N$8  (via drill 0.3)
  Top 0.203: v37.78,28.89 37.78,30.37 38.64,31.23 v38.64,32.16 v38.64,32.17 | v37.96,20.98 38.14,20.8 U$7.P$11
  Bottom 0.203: v37.78,28.89 37.78,28.26 38.1,27.94 39.69,27.94 40.01,27.62 40.01,23.03 v37.96,20.98 | 35.98,32.17 v38.64,32.17
  Bottom 0.406: R17.2 35.98,32.17
N$10
  Top 0.16: U$7.P$14 38.17,19.3 37.78,19.68 35.88,19.68 35.46,20.11
  Top 0.203: C8.1 35.46,20.11
N$11
  Top 0.305: U$7.P$30 49.43,12.8 50.8,11.43
  Top 0.406: R13.1 C5.2 50.8,10.58 50.8,11.43
N$12
  Top 0.16: U$7.P$43 51.05,19.3 51.44,19.68 53.02,19.68 54.29,20.95 56.83,20.95 59.37,23.5 59.37,24.96 60.11,25.7 60.41,25.7 C2.1
N$13
  Top 0.16: C8.2 34.73,19.35 37.63,19.35 38.18,18.8 U$7.P$15
N$14
  Top 0.203: C7.1 R20.1
N$15  (via drill 0.3)
  Top 0.406: v38.1,26.67 38.56,26.67 U$7.P$1
  Bottom 0.406: R21.2 36.41,28.36 v38.1,26.67
N$16
  Top 0.16: U$7.P$7 36.78,22.8 35.56,21.58 33.03,21.58 33.02,21.59 32.7,21.27 32.7,20.64 32.38,20.32 31.75,20.32 30.8,19.37
  Top 0.203: R16.2 30.8,19.37
N$17  (via drill 0.31)
  Top 0.16: U$7.P$55 49.79,25.3 50.4,25.9 50.4,26.51 v48.74,28.17
  Bottom 0.16: R25.2 44.8,28.44 48.47,28.44 v48.74,28.17
  Bottom 0.203: 44.35,29.53 R25.2
N$18  (via drill 0.3)
  Top 0.16: v39.83,34.55 40.55,33.83 40.55,28.53 41.91,27.17 41.91,24.35 41.14,23.57 41.14,20.06 40.88,19.8 U$7.P$13
  Bottom 0.16: C15.1 44.82,36.41 42.96,34.55 v39.83,34.55
N$19  (via drill 0.3)
  Top 0.16: v53.66,28.26 53.67,28.25 53.67,26.57 53.27,26.17 52.08,26.17 51.2,25.28 51.2,23.62 50.72,23.15 48.27,23.15 48.12,23.3 U$7.P$51
  Top 0.203: U$7.P$50 U$7.P$51 | v54.29,32.7 54.29,34.24 C10.2
  Top 0.254: v50.8,49.53 49.53,48.26 L1.2 | U$7.P$50 46.35,22.86 43.18,22.86 43.18,28.57 41.27,30.48 41.27,38.1 40.64,38.73 40.64,42.55 v41.65,43.55 v41.65,43.56
  Bottom 0.203: v53.66,28.26 53.66,32.07 v54.29,32.7
  Bottom 0.254: v50.8,49.53 50.8,47.62 | 50.8,47.62 D1.P$2 | 50.8,47.62 46.74,43.56 v41.65,43.56
N$20
  Top 0.16: 33.02,25.95 33.03,25.96 33.04,25.96 37.07,25.96 37.72,25.3 U$7.P$2
  Top 0.254: R20.2 33.02,25.95 33.02,26.67 C6.1
N$21
  Top 0.16: U$7.P$49 48.36,22.3 48.8,22.75 50.8,22.75 51.55,23.5 51.55,25.17 52.23,25.84 53.65,25.84 54.61,26.8 54.61,26.99
  Top 0.203: 54.61,26.99 54.61,28.89 54.29,29.21 R19.2
N$22
  Top 0.305: U$7.P$33 46.99,14.29 51.75,14.29
  Top 0.406: 51.75,14.29 52.7,13.34 53.12,13.34 C4.1 54.61,15.04 R10.1
N$23
  Top 0.305: U$7.P$32 50.97,13.8 52.07,12.7
  Top 0.406: R11.1 55.88,13.97 55.03,13.12 C4.2 54.19,12.7 52.07,12.7
N$24
  Top 0.305: U$7.P$31 50.2,13.3 50.8,12.7
  Top 0.406: 50.8,12.7 50.8,12.28 C5.1 53.34,11.01 R12.1
N$26
  Top 0.16: C3.1 60.67,21.2 60.65,21.25 60.57,21.07 60.12,20.7 58.3,18.91 55.39,18.92 53.16,16.69 52.18,16.69 51.69,16.2 49.86,16.2 49.27,16.8 U$7.P$38
N$27
  Top 0.152: C16.1 38.52,11.33 37.78,12.06 37.78,12.38 38.1,12.7 39.33,12.7 U$7.P$27
N$28  (via drill 0.3)
  Top 0.16: U$7.P$3 40.82,24.8 41.12,25.1 41.12,26.8 39.73,28.18 39.73,33.06 38.75,34.05 38.75,35.4 v37.84,36.31 | v36.88,40.11 36.88,42.81 R22.2
  Top 0.254: R24.1 R22.2
  Bottom 0.16: v37.84,36.31 36.88,37.27 v36.88,40.11
N$29  (via drill 0.3)
  Top 0.16: U$7.P$52 48.19,23.8 48.44,23.56 50.55,23.56 50.8,23.81 50.8,25.36 51.94,26.5 52.6,26.5 52.72,26.62 v52.72,28.45 v52.71,28.45
  Top 0.203: v52.7,32.38 52.7,34.02 C10.1
  Bottom 0.16: v52.7,32.38 v52.71,32.38 v52.71,28.45
N$30  (via drill 0.3)
  Top 0.16: 39.18,14.8 37.62,14.8 36.79,13.97 v36.44,13.95
  Top 0.203: 39.18,14.8 U$7.P$23
  Bottom 0.203: C17.1 C18.1 v36.44,13.95
N$124
  Top 0.406: R12.2 59.36,11.43 U$9.P$3
N$126  (via drill 0.3)
  Top 0.16: R10.2 57.77,17.47 v57.44,17.8 | v45.36,29.2 43.88,30.68 U$8.P$3 | v50.16,27.84 50.62,27.84 v51.53,26.93
  Bottom 0.16: v57.44,17.8 57.44,20.11 56.86,20.69 54.98,20.69 52.89,22.78 52.89,26.53 52.49,26.93 v51.53,26.93 | v45.36,29.2 | v45.36,29.2 45.74,28.82 49.17,28.82 v50.16,27.84
N$127  (via drill 0.3)
  Top 0.16: R11.2 58.61,14.58 58.61,17.75 v58.48,17.88 | v56.13,25.75 56.13,28.43 53.73,30.82 v51.39,30.82 | v51.39,33.48 44.86,33.48 43.87,34.47 U$8.P$4
  Bottom 0.16: v56.13,25.75 53.73,23.35 53.73,22.83 55.11,21.45 58,21.45 58,18.36 v58.48,17.88 | v51.39,30.82 v51.39,33.48 | v51.39,33.48
N$128  (via drill 0.3)
  Top 0.406: R13.2 55.46,8.47 56.83,9.84 57.78,9.84 v58.1,10.16 | v60.01,14.29 60.01,15.86 U$9.P$4
  Bottom 0.406: v60.01,14.29 60.01,12.06 v58.1,10.16
OCTW  (via drill 0.3)
  Top 0.16: U$7.P$5 37.8,23.8 36.83,24.77 36.2,24.77 35.88,24.45 35.88,24.13 v36.2,23.81
  Top 0.406: v26.35,30.48 v30.8,30.48
  Bottom 0.203: v36.2,23.81 35.46,23.81 R14.1 35.14,24.8 30.8,29.14 v30.8,30.48
  Bottom 0.406: CTRL.3 21.27,35.56 v26.35,30.48
PWRGD  (via drill 0.3)
  Top 0.406: U$7.P$4 37.93,24.3 v36.83,25.4 | v35.42,28.13 15.11,28.13 CTRL.1
  Bottom 0.406: v36.83,25.4 36.83,26.25 R23.2 36.41,27.09 v35.42,28.13
REF
  Top 0.152: CURR.3 30.48,6.98 | U$7.P$24 39.38,14.3
  Top 0.16: 30.48,6.98 37.8,14.3 U$7.P$24
SENS1
  Bottom 0.406: R26.2 14.24,49.8 12.7,48.26 SENS.3 15.51,44.18 R27.2
SENS2
  Bottom 0.406: 25.4,44.45 R29.2 25.39,44.18 24.47,45.1 17.13,45.1 SENS.2 17.11,48.86 21.92,48.86 R28.2
SENS3
  Bottom 0.406: R30.2 25.4,46.99 | 25.4,46.99 SENS.1 | R31.2 27.94,44.45 25.4,46.99
SO1
  Top 0.152: CURR.2 33.01,8.93 37.85,13.8 37.9,13.8 U$7.P$25
SO2
  Top 0.152: CURR.1 35.56,10.79 38.1,13.34 39.4,13.34 U$7.P$26
TEMP
  Top 0.406: 58,2.64 R32.1 58.1,1.27 48.26,1.27 TEMP.2
  Top 0.813: U$11.1 58.8,4.25 C27.1 58,2.64
VCC  (via drill 0.3, 0.31)
  Top 0.16: v50.1,24.13 49.37,24.13 48.69,24.81 U$7.P$54 | U$7.P$54 | U$7.P$54 U$7.P$53
  Top 0.254: v66.67,8.89 77.47,8.89 U$1.D1 | U$7.P$54 45.12,24.8 v45.09,24.77 45.09,27.94 42.55,30.48 42.55,38.1 43.18,38.73 55.88,38.73 58.86,35.75 58.86,34.16 58.87,34.16 C23.2
  Top 0.305: U$7.P$29 47.86,12.3 v49.53,11.43
  Top 0.406: v58.42,50.8 C24.2 | C23.2 62.23,34.16 62.23,33.02 77.47,33.02 U$4.D1 | C11.2 49.53,10.16 v49.53,11.43
  Top 1.27: U$5.D1 68.57,54.61 C24.2
  Bottom 0.16: C21.2 45.85,24 v45.09,24.77 | v50.1,24.13 50.31,24.13 C20.2 52.32,22.74 C19.2
  Bottom 0.203: C19.2 55.75,19.05
  Bottom 0.254: C14.1 43.18,41.91 45.72,41.91 C13.1 45.72,42.55 48.9,42.55 50.8,44.45 C12.1 50.8,45.09 56.52,50.8 v58.42,50.8 | v49.53,11.43 51.44,11.43 53.98,8.89 v66.67,8.89
  Bottom 0.406: v49.53,11.43 45.72,15.24 C22.2 45.73,21.47 C21.2 | U$15.P$1 v58.42,50.8
  other vias: 58.42,59.69 55.88,60.96 57.15,60.96 58.43,60.99 59.69,60.99 60.94,60.97 60.95,59.68 60.95,59.68 59.67,59.71 57.15,59.72 57.15,59.72 55.89,59.66 55.89,59.66 55.89,58.44 55.89,58.43 57.14,58.44 58.43,58.44 59.68,58.44 60.96,58.44
  pour Top (rank 6): 67.34,7.62 87.63,7.62 87.63,60.96 52.07,60.96 52.07,52.07 67.31,52.07